# Allegro board demob2.brd
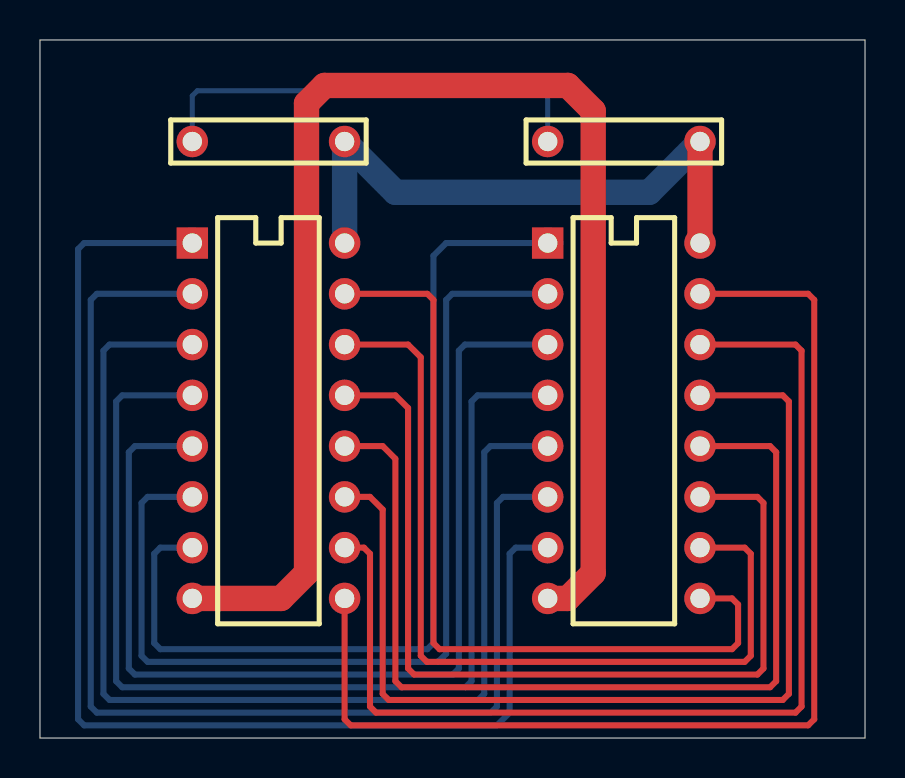
[diagram p0: board, top side]
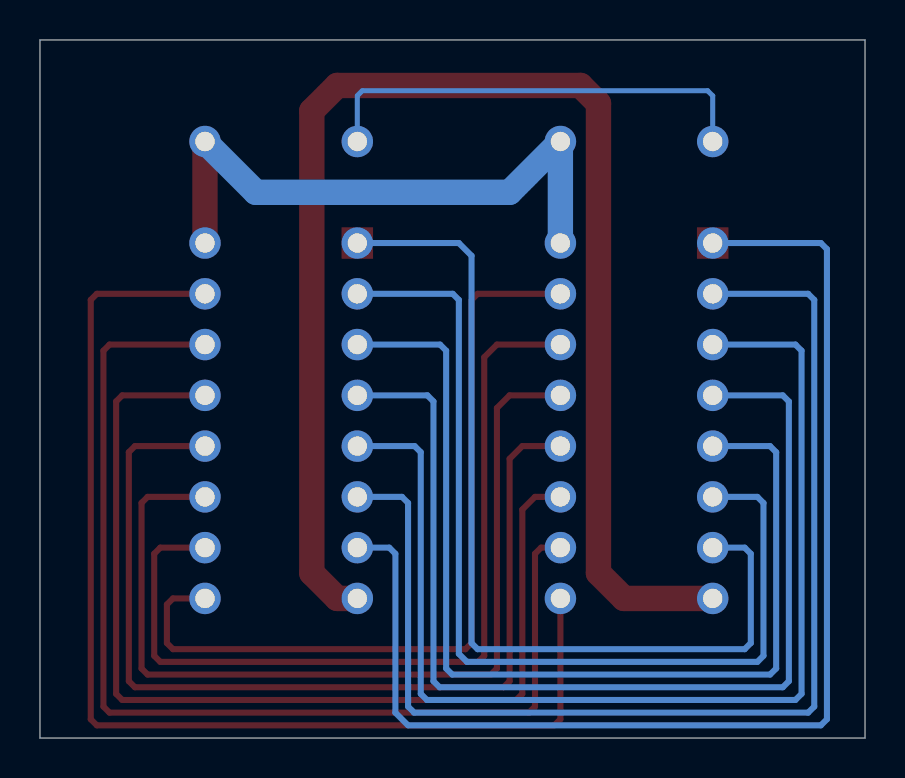
[diagram p1: board, bottom side, seen from below]

Outline 41.27 x 34.93 mm; copper layers: TOP, GND, POWER, INNER1, INNER2, BOTTOM. Coordinates in mm from the lower left corner of the outline.
Outline path: 0,34.93 41.27,34.93 41.27,0 0,0 0,34.93

## Design rules (mm)
nets with their own width: min track width 0.254; nets GND_SIGNAL
nets with their own width: min track width 0.305; nets N01899 N01900 N01901 N01902 N01903 N01904 N01905 N01906 N01907 N01908 N01909 N01910 N01911 N01912
nets with their own width: min track width 1.27; nets GND VCC

## Placement (name value [footprint] x y rotation side)
C1  CAP NP  [AC300100A]  15.24 29.85 180 top
C2  CAP NP  [AC300100A]  33.02 29.85 180 top
U1  74LS158  [DIP16]  7.62 24.77 270 top
U2  74LS158  [DIP16]  25.4 24.77 270 top

## Library data of the parts
C1 C2 = CAP_NP
U1 U2 = 74LS158

## Footprints (pads in the part's own frame, mm; a bottom-side part is the same pattern mirrored in y, then rotated)
AC300100A
  round 1.575 hole 0.965: 1(0,0) 2(7.62,0)
DIP16
  rect 1.575x1.575 hole 0.965: 1(0,0)
  round 1.575 hole 0.965: 2(2.54,0) 3(5.08,0) 4(7.62,0) 5(10.16,0) 6(12.7,0) 7(15.24,0) 8(17.78,0) 9(17.78,7.62) 10(15.24,7.62) 11(12.7,7.62) 12(10.16,7.62) 13(7.62,7.62) 14(5.08,7.62) 15(2.54,7.62) 16(0,7.62)

## Nets
GND: U1.8(TP-8) U2.8(TP-8)
GND_SIGNAL: C1.2(TP-2) C2.2(TP-2)
VCC: C1.1(TP-1) C2.1(TP-1) U1.16(TP-16) U2.16(TP-16)
N01899: U1.2(TP-2) U2.6(TP-6)
N01900: U1.3(TP-3) U2.5(TP-5)
N01901: U1.4(TP-4) U2.4(TP-4)
N01902: U1.5(TP-5) U2.3(TP-3)
N01903: U1.6(TP-6) U2.2(TP-2)
N01904: U1.7(TP-7) U2.1(TP-1)
N01905: U1.9(TP-9) U2.15(TP-15)
N01906: U1.10(TP-10) U2.14(TP-14)
N01907: U1.11(TP-11) U2.13(TP-13)
N01908: U1.12(TP-12) U2.12(TP-12)
N01909: U1.14(TP-14) U2.10(TP-10)
N01910: U1.1(TP-1) U2.7(TP-7)
N01911: U1.13(TP-13) U2.11(TP-11)
N01912: U1.15(TP-15) U2.9(TP-9)

## Routing (per net, layer and track width the routed paths; a pad name or vN(x,y) marks a point on that pad's centre or on a via; arc(x,y) is an arc through that point)
GND: length 70.9
  TOP w1.27: U1.8 12.06,6.99 13.34,8.25 13.34,31.75 14.23,32.65 26.41,32.65 27.68,31.38 27.68,8.25 26.41,6.99 U2.8
GND_SIGNAL: length 22.6
  BOTTOM w0.254: C2.2 25.4,32.13 25.15,32.39 7.87,32.39 7.62,32.13 C1.2
VCC: length 30
  TOP w1.27: C2.1 U2.16
  BOTTOM w1.27: C2.1 30.48,27.3 17.78,27.3 C1.1 U1.16
N01899: length 59
  BOTTOM w0.305: U2.6 23.16,12.07 22.86,11.76 22.86,1.57 22.56,1.27 2.84,1.27 2.54,1.57 2.54,21.92 2.84,22.22 U1.2
N01900: length 56.4
  BOTTOM w0.305: U2.5 22.53,14.61 22.23,14.3 22.23,2.21 21.92,1.91 3.48,1.91 3.17,2.21 3.17,19.38 3.48,19.68 U1.3
N01901: length 53.9
  BOTTOM w0.305: U1.4 4.11,17.14 3.81,16.84 3.81,2.84 4.11,2.54 21.29,2.54 21.59,2.84 21.59,16.84 21.89,17.14 U2.4
N01902: length 51.4
  BOTTOM w0.305: U1.5 4.75,14.61 4.45,14.3 4.45,3.48 4.75,3.17 20.65,3.17 20.95,3.48 20.95,19.38 21.26,19.68 U2.3
N01903: length 48.8
  BOTTOM w0.305: U1.6 5.38,12.07 5.08,11.76 5.08,4.11 5.38,3.81 19.91,3.81 20.32,4.22 20.32,21.92 20.62,22.22 U2.2
N01904: length 46.1
  BOTTOM w0.305: U2.1 20.32,24.77 19.68,24.13 19.68,4.75 19.38,4.45 6.02,4.45 5.71,4.75 5.71,9.22 6.02,9.52 U1.7
N01905: length 56.6
  TOP w0.305: U1.9 15.24,0.94 15.54,0.64 38.43,0.64 38.73,0.94 38.73,21.92 38.43,22.22 U2.15
N01906: length 53.9
  TOP w0.305: U1.10 16.21,9.52 16.51,9.22 16.51,1.57 16.81,1.27 37.8,1.27 38.1,1.57 38.1,19.38 37.8,19.68 U2.14
N01907: length 51.2
  TOP w0.305: U2.13 37.16,17.14 37.47,16.84 37.47,2.21 37.16,1.91 17.45,1.91 17.14,2.21 17.14,11.43 16.51,12.07 U1.11
N01908: length 48.6
  TOP w0.305: U1.12 17.14,14.61 17.78,13.97 17.78,2.84 18.08,2.54 36.53,2.54 36.83,2.84 36.83,14.3 36.53,14.61 U2.12
N01909: length 43.5
  TOP w0.305: U1.14 18.41,19.68 19.05,19.05 19.05,4.11 19.35,3.81 35.26,3.81 35.56,4.11 35.56,9.22 35.26,9.52 U2.10
N01910: length 61.3
  BOTTOM w0.305: U1.1 2.21,24.77 1.91,24.46 1.91,0.94 2.21,0.64 22.86,0.64 23.5,1.27 23.5,9.22 23.8,9.52 U2.7
N01911: length 46.1
  TOP w0.305: U2.11 35.89,12.07 36.2,11.76 36.2,3.48 35.89,3.17 18.72,3.17 18.41,3.48 18.41,16.51 17.78,17.14 U1.13
N01912: length 41.2
  TOP w0.305: U2.9 34.62,6.99 34.92,6.68 34.92,4.75 34.62,4.45 19.99,4.45 19.68,4.75 19.68,21.92 19.38,22.22 U1.15
